# Altium PCB ScienceBoard.PcbDoc
Units mil, origin at the board's own origin, x right, y up, seen from the top; angles counter-clockwise.
Board outline 6505 x 2510 mil, 2 copper layers (Top Layer, Bottom Layer); 97 components, 67 nets, 334 pads, 0 vias.
Unrouted connection lines stored in the file: 206.
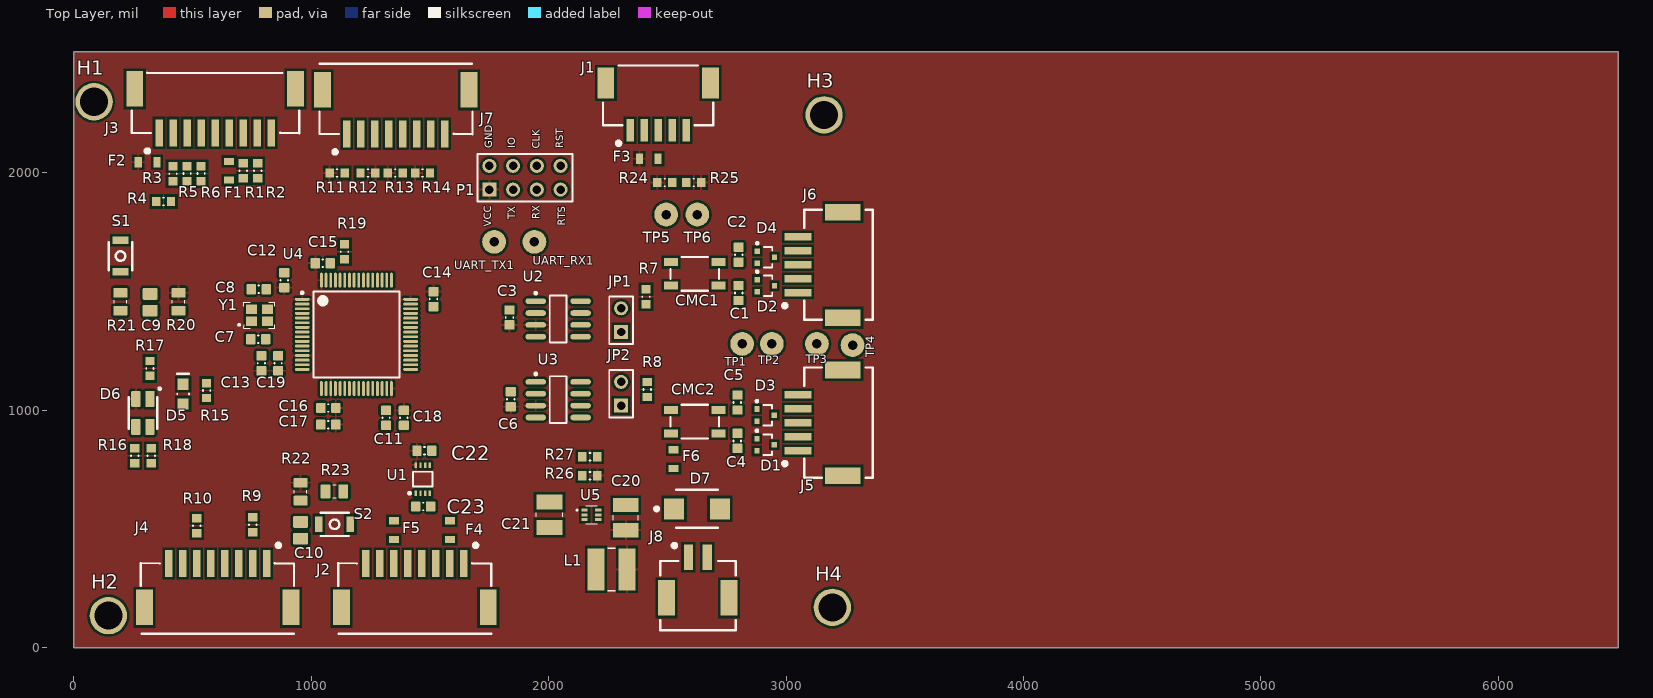
[diagram p0: Top Layer view]
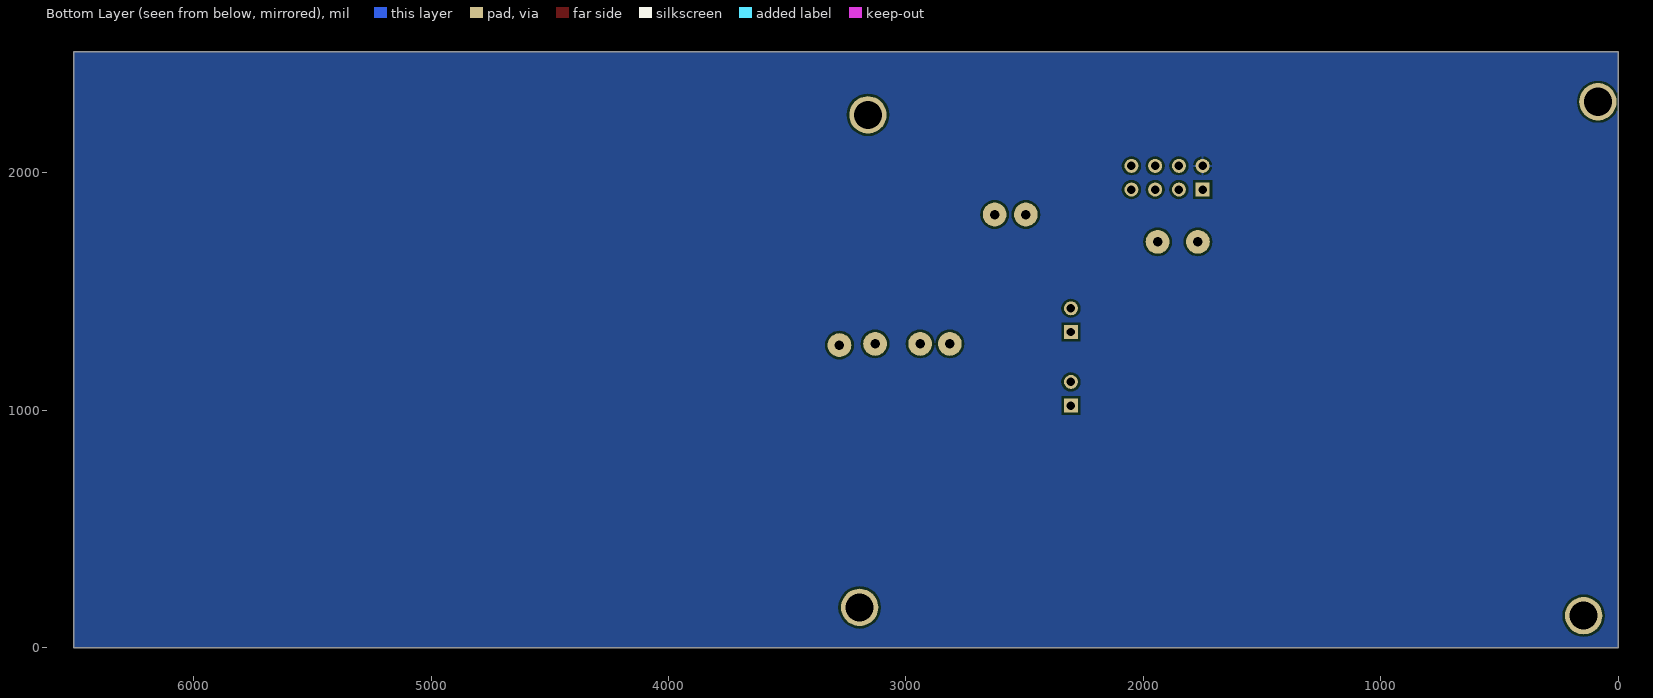
[diagram p1: Bottom Layer view, seen from below]

## Layer stack, top to bottom
Top Solder: solder mask 0.4, Solder Resist, Dk 3.5
Top Layer: signal copper 1.4
Dielectric 1: dielectric 12.6, FR-4, Dk 4.8
Bottom Layer: signal copper 1.4
Bottom Solder: solder mask 0.4, Solder Resist, Dk 3.5

## Board outline
0,0 6505,0 6505,2510 0,2510

## Design rules (kind name [scope] priority, off if disabled: settings)
Clearance [All] p1: gap=10 ignorepadtopadclearanceinfootprint=FALSE except(0: Arc-Hole Track-Hole SMDPad-Hole THPad-Hole Via-Hole Fill-Hole Poly-Hole Region-Hole Text-Hole)
DiffPairsRouting [All] p1: maxlimit=10 minlimit=10 mostfreqgap=10 toplayer_minwidth=15 toplayer_maxwidth=15 toplayer_prefwidth=15 bottomlayer_minwidth=15 bottomlayer_maxwidth=15 bottomlayer_prefwidth=15 maxuncoupledlength=500
PolygonConnect [All] p1: connectstyle=Relief reliefconductorwidth=10 reliefentries=4 polygonreliefangle="90 Angle" airgapwidth=10
RoutingVias [All] p1: holewidth=28 width=50 viastyle="Through Hole" minholewidth=28 minwidth=50 maxholewidth=28 maxwidth=50
SolderMaskExpansion [All] p1: expansion=4 istentingtop=FALSE
Width [All] p1: maxlimit=10 minlimit=10 preferedwidth=10
29 further rules are at their usual default settings.

## Classes and differential pairs
component class "SH5 - CAN": C1 C2 C3 C4 C5 C6 CMC1 CMC2 JP1 JP2 R7 R8 TP1 TP2 TP3 TP4 U2 U3
component class "SH4 - MICROCONTROLLER": C7 C8 C9 C10 C11 C12 C13 C14 C15 C16 C17 C18 C19 D5 D6 P1 R15 R16 R17 R18 R19 R20 R21 R22 R23 R24 R25 S1 S2 TP5 TP6 U4 UART_RX1 UART_TX1 Y1
component class "SH3 - SIGNAL CONDITIONING": C22 C23 H1 H2 H3 H4 R1 R2 R3 R4 R5 R6 U1
component class "SH2 - CONNECTORS": D1 D2 D3 D4 F1 F2 F3 F4 F5 J1 J2 J3 J4 J5 J6 J7 R9 R10 R11 R12 R13 R14
component class "SH1 - POWER": C20 C21 D7 F6 J8 L1 R26 R27 U5
differential pair CAN2: +CAN2_P -CAN2_N
differential pair CAN1: +CAN1_P -CAN1_N

## Components (designator, comment, footprint, x,y, rotation, side; value= is the part's Value field where it differs from the comment)
C1 "CAP_33pF_50V_0603" CAPC0603(1608)55_N 2800,1494.29 r90 top value=33pF
C2 "CAP_33pF_50V_0603" CAPC0603(1608)55_N 2800,1655.71 r270 top value=33pF
C3 "CAP_0.1uF_16V_0603" CAPC0603(1608)55_N 1835,1391.5 r90 top value=0.1μF
C4 "CAP_33pF_50V_0603" CAPC0603(1608)55_N 2795,871.5 r90 top value=33pF
C5 "CAP_33pF_50V_0603" CAPC0603(1608)55_N 2795,1032.91 r270 top value=33pF
C6 "CAP_0.1uF_16V_0603" CAPC0603(1608)55_N 1840,1046.5 r90 top value=0.1μF
C7 "50v" CAPC0603(1608)55_N 776.5,1300 r180 top value=14pF
C8 "50v" CAPC0603(1608)55_N 778.5,1510 r0 top value=14pF
C9 "CAP_1uF_16V_0805" CAPC2012X140N 321.16,1455.24 r270 top value=1uF
C10 "CAP_1uF_16V_0805" CAPC2012X140N 955,494.76 r90 top value=1uF
C11 "CAP_4.7uF_0603" CAPC0603(1608)55_N 1315,968.5 r90 top value=4.7μF
C12 "CAP_0.1uF_16V_0603" CAPC0603(1608)55_N 886.16,1548.5 r270 top value=0.1μF
C13 "CAP_1uF_16V_0603" CAPC0603(1608)55_N 790,1198.5 r270 top value=1μF
C14 "CAP_0.1uF_16V_0603" CAPC0603(1608)55_N 1515,1468.5 r90 top value=0.1μF
C15 "CAP_0.1uF_16V_0603" CAPC0603(1608)55_N 1048.5,1620 r180 top value=0.1μF
C16 "CAP_0.1uF_16V_0603" CAPC0603(1608)55_N 1071.5,1010 r0 top value=0.1μF
C17 "CAP_0.1uF_16V_0603" CAPC0603(1608)55_N 1071.5,940 r0 top value=0.1μF
C18 "CAP_4.7uF_0603" CAPC0603(1608)55_N 1390,968.5 r90 top value=4.7μF
C19 "CAP_10nF_0603" CAPC0603(1608)55_N 860,1198.5 r270 top value=10μF
C20 "GRM32ER71E226ME15K" CAPC3225X270N 2325.03,548.11 r270 top
C21 "CAP_4.7uF_25V_1210" CAPC3225X280N 2003.48,560 r270 top value=4.7uF
C22 "CAP_10nF_0603" CAPC0603(1608)55_N 1476.5,830 r0 top value=10μF
C23 "CAP_10nF_0603" CAPC0603(1608)55_N 1471.5,595 r180 top value=10μF
CMC1 "CMC_51uH" 744212510 2615.39,1575 r0 top
CMC2 "CMC_51uH" 744212510 2615.39,952.2 r0 top
D1 "TVS_DIODE_CAN" NXP-SOT323-3 2913.58,855 r0 top
D2 "TVS_DIODE_CAN" NXP-SOT323-3 2915,1525 r0 top
D3 "TVS_DIODE_CAN" NXP-SOT323-3 2913.58,980 r0 top
D4 "TVS_DIODE_CAN" NXP-SOT323-3 2915,1645 r0 top
D5 "LG R971-KN-1" LED_0805_LINE 460,1068.66 r90 top
D6 "LED_RGB" LED_RGB 290.69,989.06 r180 top
D7 "TVS_DIODE_UNIDIR_5V" TVS_DIODE_BIDIRECTIONAL 2624.7,585 r0 top
F1 "FUSE_250mA_0603" FUSE_0603 653.8,2009.57 r270 top
F2 "FUSE_250mA_0603" FUSE_0603 310.73,2045 r180 top
F3 "FUSE_250mA_0603" FUSE_0603 2421.59,2060 r0 top
F4 "FUSE_1.5A_0603" FUSE_0603 1584.06,495.43 r90 top
F5 "FUSE_1.5A_0603" FUSE_0603 1347.83,495.43 r90 top
F6 "FUSE_2A_0603" FUSE_0603 2526.16,794.57 r90 top
H1 "MOUNTING_HOLES" MOUNTING_HOLE 85,2300 r180 top
H2 "MOUNTING_HOLES" MOUNTING_HOLE 145,135 r0 top
H3 "MOUNTING_HOLES" MOUNTING_HOLE 3160,2245 r180 top
H4 "MOUNTING_HOLES" MOUNTING_HOLE 3195,170 r0 top
J1 "CON_5M_SM_VERT" MOLEX-5025840570 2461.16,2280 r0 top
J2 "CON_8M_SM_RA" MOLEX-5025850870 1229.72,355.04 r180 top
J3 "CON_9M_SM_RA" Molex-5025850970 358.52,2168.96 r0 top
J4 "CON_8M_SM_RA" MOLEX-5025850870 399.25,355.04 r180 top
J5 "" MOLEX-5025850570 3030.36,948.11 r270 top
J6 "" MOLEX-5025850570 3030.36,1613.43 r270 top
J7 "CON_8M_SM_RA" MOLEX-5025850870 1562.38,2165 r0 top
J8 "CON_2M_SM_RA" MOLEX-5024940270 2628.11,295.63 r0 top
JP1 "JUMPER_2" HDR1X2 2305,1330 r90 top
JP2 "JUMPER_2" HDR1X2 2305,1020 r90 top
L1 "IND_1uH_3.8A" IND_BOURNS_SDR04 2265.03,330.32 r0 top value=1uH
P1 "HEADER 4X2" HEADER_2X4 1750,1930 r0 top
R1 "RES_2.2kΩ_0603" RESC0603(1608)_N 712.85,2041.06 r270 top value=2.2kΩ
R2 "RES_3.3kΩ_0603" RESC0603(1608)_N 775,1978.07 r90 top value=3.3kΩ
R3 "RES_2.2kΩ_0603" RESC0603(1608)_N 417.58,2027.99 r270 top value=2.2kΩ
R4 "RES_3.3kΩ_0603" RESC0603(1608)_N 346.16,1880 r0 top value=3.3kΩ
R5 "RES_2.2kΩ_0603" RESC0603(1608)_N 476.63,1966.01 r90 top value=2.2kΩ
R6 "RES_3.3kΩ_0603" RESC0603(1608)_N 535.69,1966.01 r90 top value=3.3kΩ
R7 "RES_120Ω_0603" RESC0603(1608)_N 2410,1447.01 r90 top value=120Ω
R8 "RES_120Ω_0603" RESC0603(1608)_N 2415,1056.42 r90 top value=120Ω
R9 "RES_10kΩ_0603" RESC0603(1608)_N 753.58,550 r270 top value=10kΩ
R10 "RES_10kΩ_0603" RESC0603(1608)_N 517.36,545 r270 top value=10kΩ
R11 "RES_10kΩ_0603" RESC0603(1608)_N 1140.16,2000 r180 top value=10kΩ
R12 "RES_10kΩ_0603" RESC0603(1608)_N 1207.17,2000 r0 top value=10kΩ
R13 "RES_10kΩ_0603" RESC0603(1608)_N 1385.16,2000 r180 top value=10kΩ
R14 "RES_10kΩ_0603" RESC0603(1608)_N 1500.16,2000 r180 top value=10kΩ
R15 "RES_120Ω_0603" RESC0603(1608)_N 558.84,1115 r270 top value=120Ω
R16 "RES_20Ω_0603" RESC0603(1608)_N 256.16,840 r270 top value=20Ω
R17 "RES_120Ω_0603" RESC0603(1608)_N 320.21,1207.99 r270 top value=120Ω
R18 "RES_20Ω_0603" RESC0603(1608)_N 326.16,840 r270 top value=20Ω
R19 "RES_1kΩ_0603" RESC0603(1608)_N 1140,1637.01 r90 top value=1kΩ
R20 "RES_10kΩ_0805" RESC2012X60N 441.16,1457.6 r90 top value=10kΩ
R21 "RES_10kΩ_0805" RESC2012X60N 196.16,1457.6 r270 top value=10kΩ
R22 "RES_10kΩ_0805" RESC2012X60N 955,657.4 r90 top value=10kΩ
R23 "RES_10kΩ_0805" RESC2012X60N 1097.4,658.84 r0 top value=10kΩ
R24 "RES_1kΩ_0603" RESC0603(1608)_N 2520.21,1960 r180 top value=1kΩ
R25 "RES_1kΩ_0603" RESC0603(1608)_N 2579.27,1960 r0 top value=1kΩ
R26 "RES_453kΩ_0603" RESC0603(1608)_N 2142.01,725 r0 top value=453kΩ
R27 "RES_100kΩ_0603_1%" RESC0603(1608)_N 2205,805 r180 top value=100kΩ
S1 "SW_TACTILE" B3U-1000P 196.16,1650 r90 top
S2 "SW_TACTILE" B3U-1000P 1098.07,520 r180 top
TP1 "TESTPOINT_LOOP" TESTPOINT_LOOP 2815,1280 r0 top
TP2 "TESTPOINT_LOOP" TESTPOINT_LOOP 2940,1280 r0 top
TP3 "TESTPOINT_LOOP" TESTPOINT_LOOP 3130,1280 r0 top
TP4 "TESTPOINT_LOOP" TESTPOINT_LOOP 3280,1275 r0 top
TP5 "TESTPOINT_LOOP" TESTPOINT_LOOP 2495,1825 r270 top
TP6 "TESTPOINT_LOOP" TESTPOINT_LOOP 2626.16,1825 r270 top
U1 "SN74LVC2T45DCURG4" DCU0008A_L 1470,710 r90 top
U2 "IC TXRX CAN" LT-S8_N 2040,1385 r0 top
U3 "IC TXRX CAN" LT-S8_N 2040,1045 r0 top
U4 "STM32F446RET6" STM-LQFP64_L 1190.16,1320 r0 top
U5 "TLV62568ADRLR" SOT50P160X60-6N 2180.1,560 r0 top
UART_RX1 "TESTPOINT_LOOP" TESTPOINT_LOOP 1940,1710 r90 top
UART_TX1 "TESTPOINT_LOOP" TESTPOINT_LOOP 1770,1710 r90 top
Y1 "CRYSTAL_25MHZ" SOIC254P1016X440-4N 781.54,1400.59 r0 top

## Footprints (in the part's own frame and the unit in brackets; to place one, negate y for a bottom-side part, rotate by r counter-clockwise, add the part's x,y. Pads: shape width x height; smd on the part's side, far side on the other; paste and mask are expansions set on the pad)
744212510 [mm] "CMC HORIZONTAL 4 J-LEAD"
  rect 1.5x0.85 smd: 1(-2.55,-1.25) 3(-2.55,1.25) 4(2.55,1.25) 5(2.55,-1.25)
  silkscreen extent -2.6,-1.8 2.6,1.8, body extent -2.6,-1.8 2.6,1.8, height 1.67
B3U-1000P [mm] "TACTILE SWITCH GREY"
  rect 0.8x1.7 smd: 1(-1.7,0) 2(1.7,0)
  silkscreen extent -1.5,-1.25 1.5,1.25, body extent -2,-1.25 2,1.25, height 1.6
CAPC0603(1608)55_N [mm] "Chip Capacitor, Body 1.6x0.8mm, Height 0.55mm, IPC Medium Density"
  rrect20% 1x1.1 smd: 1(-0.8,0) 2(0.8,0)
  silkscreen extent -0.05,-0.4 0.05,0.4, body extent -0.87,-0.48 0.88,0.48, height 0.87
CAPC2012X140N [mm]
  rrect20% 1.25x1.6 smd: 1(-0.895,0) 2(0.895,0)
  body extent -1.1,-0.7 1.1,0.75, height 1.41
CAPC3225X270N [mm]
  rect 1.53x2.72 smd: 1(-1.341,0) 2(1.341,0)
  silkscreen extent -0.26,-1.35 0.26,1.35, body extent -1.6,-1.35 1.6,1.35, height 2.55
CAPC3225X280N [mm]
  rect 1.6x2.81 smd: 1(-1.353,0) 2(1.353,0)
  silkscreen extent -0.23,-1.4 0.23,1.4, body extent -1.6,-1.4 1.6,1.4, height 2.5
DCU0008A_L [mm] "SOP, 8-Leads, Body 2.4x2.1mm, Pitch 0.5mm, IPC High Density"
  rrect40% 0.6x0.25 smd: 1(-1.5,0.75) 2(-1.5,0.25) 3(-1.5,-0.25) 4(-1.5,-0.75) 5(1.5,-0.75) 6(1.5,-0.25) 7(1.5,0.25) 8(1.5,0.75)
  silkscreen extent -1.62,-1.05 0.8,1.55, body extent -1.56,-1 1.56,1, height 0.9
FUSE_0603 [mm] "Chip Fuse, Body 1.6x0.81mm"
  rect 0.762x1.09 smd: 1(-1.005,0) 2(1.005,0)
  body extent -0.8,-0.38 0.8,0.38, height 0.75
HDR1X2 [mm] "Connector; Header; 2 Position"
  rect 1.5x1.5 hole 0.9: 1(0,0)
  round 1.5 hole 0.9: 2(2.54,0)
  silkscreen extent -1.27,-1.27 3.81,1.27, body extent -1.27,-1.27 3.81,1.27, height 6.35
HEADER_2X4 [mm]
  rect 1.5x1.5 hole 0.9: 1(0,0)
  round 1.5 hole 0.9: 2(2.54,0) 3(5.08,0) 4(7.62,0) 5(0,2.54) 6(2.54,2.54) 7(5.08,2.54) 8(7.62,2.54)
  silkscreen extent -1.27,-1.27 8.89,3.81, body extent -1.36,-1.32 8.8,3.67, height 8.54
IND_BOURNS_SDR04 [mil]
  rect 71x177 smd paste+0 mask+0: 1(-65,0) 2(65,0)
  silkscreen extent -16,-90 16,90
LED_0805_LINE [mm] "SMD, 2-Leads, Body 2x1.25mm"
  rect 1.2x1.2 smd: 1(-1.05,0) 2(1.05,0)
  silkscreen extent -0.05,-0.63 2.16,0.64, body extent -1,-0.63 1,0.63, height 0.8
LED_RGB [mm]
  rrect20% 1x1.7 smd: 1(-0.75,-1.5) 2(-0.75,1.5) 3(0.75,1.5) 4(0.75,-1.5)
  silkscreen extent -1.92,-2.72 1.53,1.7, body extent -1.4,-1.75 1.4,1.75, height 1.89
LT-S8_N [mm] "SOP, 8-Leads, Body 4.9x3.9mm, Pitch 1.27mm, IPC Medium Density"
  oval 2.2x0.6 smd: 1(-2.4,1.905) 2(-2.4,0.635) 3(-2.4,-0.635) 4(-2.4,-1.905) 5(2.4,-1.905) 6(2.4,-0.635) 7(2.4,0.635) 8(2.4,1.905)
  silkscreen extent -2.52,-2.5 0.9,2.88, body extent -2,-2.5 2,2.5, height 1.76
MOLEX-5024940270 [mm] "Molex 5024940670 2 pin 2mm pitch SMD RA connector"
  rect 1.8x3.8 smd: 0(-3.35,-2.175) 0(3.35,-2.175)
  rect 1x2.7 smd: 1(-1,2.175) 2(1,2.175)
  silkscreen extent -4,-5.64 4.06,3.62, body extent -4,-5.74 4,2.76, height 6.91
MOLEX-5025840570 [mm] "Molex 5024940670 12 pin 1.5 mm pitch SMD vertical connector"
  rect 1.8x3.3 smd: 0(-5.6,2.525) 0(5.6,2.525)
  rect 0.8x2.4 smd: 1(-3,-2.525) 2(-1.5,-2.525) 3(0,-2.525) 4(1.5,-2.525) 5(3,-2.525)
  silkscreen extent -5.9,-4.14 5.9,4.39, body extent -5.9,-3.01 5.9,4.39, height 7.31
MOLEX-5025850570 [mm]
  rect 1.8x3.8 smd: 0(-5.625,5.32) 0(5.675,5.32)
  rect 0.8x2.9 smd: 1(3,0.5) 2(1.5,0.5) 3(0,0.5) 4(-1.5,0.5) 5(-3,0.5)
  silkscreen extent -5.9,-1.1 5.9,8.5, body extent -5.9,0 5.9,8.5, height 6.21
MOLEX-5025850870 [mm]
  rect 1.8x3.8 smd: 0(-13.1,4.7) 0(2.6,4.7)
  rect 0.8x2.9 smd: 1(-10.5,0) 2(-9,0) 3(-7.5,0) 4(-6,0) 5(-4.5,0) 6(-3,0) 7(-1.5,0) 8(0,0)
  silkscreen extent -13.4,-2.14 2.97,7.51, body extent -13.4,-0.99 2.9,7.51, height 6.41
Molex-5025850970 [mm]
  rect 1.8x3.8 smd: 0(-2.6,4.7) 0(14.6,4.7)
  rect 0.8x2.9 smd: 1(0,0) 2(1.5,0) 3(3,0) 4(4.5,0) 5(6,0) 6(7.5,0) 7(9,0) 8(10.5,0) 9(12,0)
  silkscreen extent -2.9,-2.14 15,6.45, body extent -2.9,-1.52 14.9,6.98, height 2.6
MOUNTING_HOLE [mm]
  round 4 hole 3 unplated: 0(0,0)
NXP-SOT323-3 [mm] "SOT23, 3-Leads, Body 2.2x1.35mm, Pitch 0.65mm"
  rect 0.55x0.6 smd paste-1: 1(-0.925,0.65) 2(-0.925,-0.65) 3(0.925,0)
  silkscreen extent -1.05,-1.1 0.67,1.62, body extent -1.15,-1.1 1.15,1.1, height 1.1
RESC0603(1608)_N [mm] "Chip Resistor, Body 1.6x0.8mm, IPC Medium Density"
  rect 0.9x1 smd: 1(0,0) 2(1.6,0)
  silkscreen extent 0.75,-0.4 0.85,0.4, body extent -0.05,-0.47 1.65,0.47, height 0.6
RESC2012X60N [mm]
  rrect20% 1.05x1.5 smd: 1(-0.955,0) 2(0.955,0)
  silkscreen extent -0.17,-0.68 0.17,0.68, body extent -1,-0.62 1,0.62, height 0.6
SOIC254P1016X440-4N [mm]
  rect 1.2x1 smd: 1(-0.85,-0.65) 2(0.85,-0.65) 3(0.85,0.65) 4(-0.85,0.65)
  silkscreen extent -2.27,-1.37 1.65,1.37, body extent -1.24,-0.85 1.24,0.85, height 0.56
SOT50P160X60-6N [mm]
  rect 0.66x0.31 smd: 1(-0.735,0.5) 2(-0.735,0) 3(-0.735,-0.5) 4(0.735,-0.5) 5(0.735,0) 6(0.735,0.5)
  silkscreen extent -1.62,-0.97 0.6,0.97, body extent -0.8,-0.8 0.8,0.8, height 0.6
STM-LQFP64_L [mm] "QFP, 64-Leads, Body 10x10mm, Pitch 0.5mm, IPC High Density"
  oval 1.6x0.3 smd: 1(-5.8,3.75) 2(-5.8,3.25) 3(-5.8,2.75) 4(-5.8,2.25) 5(-5.8,1.75) 6(-5.8,1.25) 7(-5.8,0.75) 8(-5.8,0.25) 9(-5.8,-0.25) 10(-5.8,-0.75) 11(-5.8,-1.25) 12(-5.8,-1.75) 13(-5.8,-2.25) 14(-5.8,-2.75) 15(-5.8,-3.25) 16(-5.8,-3.75) 33(5.8,-3.75) 34(5.8,-3.25) 35(5.8,-2.75) 36(5.8,-2.25) 37(5.8,-1.75) 38(5.8,-1.25) 39(5.8,-0.75) 40(5.8,-0.25) 41(5.8,0.25) 42(5.8,0.75) 43(5.8,1.25) 44(5.8,1.75) 45(5.8,2.25) 46(5.8,2.75) 47(5.8,3.25) 48(5.8,3.75)
  oval 0.3x1.6 smd: 17(-3.75,-5.8) 18(-3.25,-5.8) 19(-2.75,-5.8) 20(-2.25,-5.8) 21(-1.75,-5.8) 22(-1.25,-5.8) 23(-0.75,-5.8) 24(-0.25,-5.8) 25(0.25,-5.8) 26(0.75,-5.8) 27(1.25,-5.8) 28(1.75,-5.8) 29(2.25,-5.8) 30(2.75,-5.8) 31(3.25,-5.8) 32(3.75,-5.8) 49(3.75,5.8) 50(3.25,5.8) 51(2.75,5.8) 52(2.25,5.8) 53(1.75,5.8) 54(1.25,5.8) 55(0.75,5.8) 56(0.25,5.8) 57(-0.25,5.8) 58(-0.75,5.8) 59(-1.25,5.8) 60(-1.75,5.8) 61(-2.25,5.8) 62(-2.75,5.8) 63(-3.25,5.8) 64(-3.75,5.8)
  silkscreen extent -5.92,-4.6 4.6,4.6, body extent -5,-5 5,5, height 1.6
TESTPOINT_LOOP [mm]
  round 2.54 hole 1.02: 1(0,0)
  body extent -1.27,-1.27 1.27,1.27, height 4.57
TVS_DIODE_BIDIRECTIONAL [mm]
  rect 2.16x2.26 smd: 1(-2.45,0) 2(2.45,0)
  silkscreen extent -4.5,-2.03 2.25,2.03, body extent -2.7,-1.8 2.7,1.8, height 2.27

## Part data
C1 C2 C4 C5: "CAP CER 33PF 50V C0G/NP0", Case Code (Imperial)=0603, Case Code (Metric)=1608, Dielectric="C0G, NP0", Dielectric Material=Ceramic, Insulation Resistance=100GR, Manufacturer 1=Yageo, Manufacturer Part Number 1=CC0603JRNPO9BN330, Max Operating Temperature=125°C, Min Operating Temperature=-55°C, Supplier Part Number 1=311-1064-1-ND, Temperature Coefficient=30ppm/°C, Tolerance=5%, Voltage=50V, ComponentLink7Description=https://datasheet.ciiva.com/11464/upy-gp-np0-16v-to-50v-8-11464730.pdf?src-supplier=Avnet, ComponentLink7URL=https://datasheet.ciiva.com/11464/upy-gp-np0-16v-to-50v-8-11464730.pdf?src-supplier=Avnet, ComponentLink8Description=https://datasheet.ciiva.com/46430/1835847-46430155.pdf?src-supplier=Element14, ComponentLink8URL=https://datasheet.ciiva.com/46430/1835847-46430155.pdf?src-supplier=Element14, ComponentLink9Description=https://datasheet.ciiva.com/144/mlccorderingcode-144644.pdf?src-supplier=Digi-Key, ComponentLink9URL=https://datasheet.ciiva.com/144/mlccorderingcode-144644.pdf?src-supplier=Digi-Key, ComponentLink10Description=https://datasheet.ciiva.com/5426/upy-gp-np0-16v-to-50v-8-5426614.pdf?src-supplier=Mouser, ComponentLink10URL=https://datasheet.ciiva.com/5426/upy-gp-np0-16v-to-50v-8-5426614.pdf?src-supplier=Mouser, ComponentLink11Description=https://datasheet.ciiva.com/7978/1443161-7978142.pdf?src-supplier=Element14, ComponentLink11URL=https://datasheet.ciiva.com/7978/1443161-7978142.pdf?src-supplier=Element14, Composition=Ceramic, Depth=0.8mm, Height=0.8mm, Length=1.6mm, Mount="Surface Mount", Number of Pins=2, Package=0603, REACH SVHC="No SVHC", Supplier 1=Digi-Key, Termination=SMD/SMT, Thickness=0.035inch, Voltage Rating=50V, Voltage Rating (DC)=50V, Width=0.031inch
C3 C6 C12 C14 C15 C16 C17: "CAP CER 0.1UF 16V X7R 0603", Case Code (Imperial)=0603, Case Code (Metric)=1608, Dielectric=X7R, Manufacturer 1=Yageo, Manufacturer Part Number 1=CC0603KRX7R7BB104, Package="0603 (1608 Metric)", Supplier Part Number 1=311-1088-1-ND, Voltage Rating=16V, Dimensions="0.063\" L x 0.031\" W (1.60mm x 0.80mm)", Mount="Surface Mount", Supplier 1=Digi-Key, Temperature Coefficient=X7R
C7 C8: library part CAP_14pF_50V_0603, "CAP CER 14PF 50V C0G/NP0 0603", Case Code (Imperial)=0603, Case Code (Metric)=1608, Dielectric="C0G, NP0", Manufacturer 1=Samsung, Manufacturer Part Number 1=CL10C140JB8NNNC, Max Operating Temperature=125°C, Min Operating Temperature=-55°C, Package="0603 (1608 Metric)", Supplier Part Number 1=1276-2187-1-ND, Tolerance=5%, Voltage Rating=50V, Depth=0.8mm, Height=0.8mm, Length=1.6mm, Mount="Surface Mount", Supplier 1=Digi-Key, Thickness=0.035inch, Voltage Rating (DC)=50V, Width=0.031inch
C9 C10: "CAP CER 1UF 16V X7R 0805", Capacitance=1uF, Case Code (Imperial)=0805, Case Code (Metric)=2012, Dielectric=X7R, Manufacturer 1=Yageo, Manufacturer Part Number 1=CC0805KKX7R7BB105, Max Operating Temperature=125°C, Min Operating Temperature=-55°C, Supplier Part Number 1=311-1365-1-ND, Tolerance=10%, Voltage Rating=16V, Case/Package=0805, Mount="Surface Mount", Supplier 1=Digi-Key, Termination=SMD/SMT
C11 C18: "CAP CER 4.7UF 6.3V X5R 0603", Case Code (Imperial)=0603, Case Code (Metric)=1608, Dielectric=X5R, Manufacturer 1=Yageo, Manufacturer Part Number 1=CC0603KRX5R5BB475, Package="0603 (1608 Metric)", Supplier Part Number 1=311-1521-1-ND, Voltage Rating=6.3V, Dimensions="0.063\" L x 0.031\" W (1.60mm x 0.80mm)", Mount="Surface Mount", Supplier 1=Digi-Key, Temperature Coefficient=X5R
C13: "CAP CER 1UF 16V Y5V 0603", Case Code (Imperial)=0603, Case Code (Metric)=1608, Dielectric=Y5V, Manufacturer 1=Yageo, Manufacturer Part Number=CC0603ZRY5V7BB105, Package="0603 (1608 Metric)", Supplier Part Number 1=311-1372-1-ND, Voltage Rating=16V, Dimensions="0.063\" L x 0.031\" W (1.60mm x 0.80mm)", Manufacturer Part Number 1=CC0603ZRY5V7BB105, Mount="Surface Mount", Supplier 1=Digi-Key, Temperature Coefficient=Y5V
C19 C22 C23: "CAP CER 10000PF 16V X7R 0603", Case Code (Imperial)=0603, Case Code (Metric)=1608, Dielectric=X7R, Manufacturer 1=Yageo, Manufacturer Part Number 1=CC0603KRX7R7BB103, Package="0603 (1608 Metric)", Supplier Part Number 1=311-3369-1-ND, Voltage Rating=16V, Dimensions="0.063\" L x 0.031\" W (1.60mm x 0.80mm)", Mount="Surface Mount", Supplier 1=Digi-Key, Temperature Coefficient=X7R
C20: "CAP CER 22UF 25V X7R 1210", Capacitance=22uF, Manufacturer 1="Murata Electronics", Package="1210 (3225 Metric)", Supplier Part Number 1=490-14682-1-ND, Tolerance=±20%, Voltage=25V, Manufacturer Part Number 1=GRM32ER71E226ME15K, Supplier 1=Digi-Key
C21: "CAP CER 4.7UF 25V X8L 1210", Capacitance=4.7uF, Case Code (Imperial)=1210, Case Code (Metric)=3225, Manufacturer 1="Murata Electronics", Manufacturer Part Number 1=GCJ32EL81E475KA01L, Max Operating Temperature=150°C, Min Operating Temperature=-55°C, Supplier Part Number 1=490-16465-1-ND, Tolerance=10%, Voltage Rating=25V, Case/Package=1210, Mount="Surface Mount", Supplier 1=Digi-Key
CMC1 CMC2: "CMC 51uH 300MA 2LN SMD", Case/Package=SMD/SMT, Current=300mA, DC Resistance (DCR)=160mR, Inductance=51uH, Inductance Tolerance=50%, Manufacturer 1="Wurth Electronics", Manufacturer Part Number 1=744212510, Max Operating Temperature=105°C, Min Operating Temperature=-40°C, Supplier Part Number 1=732-3941-1-ND, Test Frequency=100kHz, Voltage Rating (DC)=80V, ComponentLink7Description=https://datasheet.ciiva.com/6216/744212510-6216348.pdf?src-supplier=Digi-Key, ComponentLink7URL=https://datasheet.ciiva.com/6216/744212510-6216348.pdf?src-supplier=Digi-Key, ComponentLink8Description=https://datasheet.ciiva.com/7764/1735560-7764951.pdf?src-supplier=Element14, ComponentLink8URL=https://datasheet.ciiva.com/7764/1735560-7764951.pdf?src-supplier=Element14, Core Material=Ferrite, Current Rating=300mA, Depth=3.6mm, Height=1.65mm, Impedance=300R, Length=6.5mm, Max DC Current=300mA, Mount="Surface Mount", Number of Lines=2, Number of Pins=4, REACH SVHC="No SVHC", Supplier 1=Digi-Key, Termination=SMD/SMT, Tolerance=50%, Width=0.142inch
D1 D2 D3 D4: "TVS DIODE 24V 41V SOT323-3", Manufacturer="Nexperia USA Inc.", Manufacturer Part Number=PESD2CAN,215, Package="SC-70, SOT-323", Supplier Part Number 1=1727-3891-1-ND, ComponentLink1Description=Datasheet, ComponentLink1URL=https://assets.nexperia.com/documents/data-sheet/PESD1CAN-U.pdf, Supplier 1=Digi-Key
D5: library part DIO_LED_G, "LED GREEN DIFFUSED 0805 SMD", Forward Voltage Drop=2.2V, Manufacturer 1=OSRAM, Package="0805 (2012 Metric)", Supplier Part Number 1=475-1410-1-ND, Manufacturer Part Number 1="LG R971-KN-1", Mount="Surface Mount", Supplier 1=Digi-Key
D6: "LED RGB DIFFUSED 4PLCC SMD", Case/Package=PLCC, Color=Blue,Green,Red, Forward Voltage=3.1V, Lens Color=White, Manufacturer 1=Broadcom, Manufacturer Part Number 1=ASMB-MTB1-0A3A2, Supplier Part Number 1=516-3280-1-ND, Test Current=20mA, ComponentLink1Description=http://www.farnell.com/datasheets/2111106.pdf?src-supplier=Farnell, ComponentLink1URL=http://www.farnell.com/datasheets/2111106.pdf?src-supplier=Farnell, ComponentLink2Description=https://docs.broadcom.com/docs/AV02-4194EN?src-supplier=Digi-Key, ComponentLink2URL=https://docs.broadcom.com/docs/AV02-4194EN?src-supplier=Digi-Key, ComponentLink3Description=http://www.farnell.com/datasheets/1801564.pdf?src-supplier=Element14, ComponentLink3URL=http://www.farnell.com/datasheets/1801564.pdf?src-supplier=Element14, ComponentLink4Description=http://www.farnell.com/datasheets/2111106.pdf?src-supplier=Newark, ComponentLink4URL=http://www.farnell.com/datasheets/2111106.pdf?src-supplier=Newark, Dominant Wavelength=470nm, Height=1.9mm, Length=3.2mm, Lens Style=Round, Lens Transparency=Diffused, Luminous Intensity=350mcd, Mount="Surface Mount", Number of Pins=4, Packaging="Cut Tape", Pricing 1="1=0.60000, 10=0.47100, 100=0.30210, 500=0.25980, 1000=0.20059 (USD)", REACH SVHC="No SVHC", RoHS=Yes, Stock 1=142531, Supplier 1=Digi-Key, Viewing Angle=115°, Width=2.8mm
D7: "TVS DIODE 5V 9.2V DO214AA", Breakdown Voltage=6.4V, Case/Package=SMB, Clamping Voltage=9.2V, Current=68A, Leakage Current=800uA, Manufacturer 1=Littelfuse, Manufacturer Part Number 1=SMBJ5.0A, Max Breakdown Voltage=7V, Max Operating Temperature=150°C, Max Power Dissipation=600W, Max Surge Current=65.3A, Min Operating Temperature=-55°C, Operating Supply Voltage=5V, Power Line Protection=No, Supplier Part Number 1=SMBJ5.0ALFCT-ND, Test Current=10mA, ComponentLink7Description=https://datasheet.ciiva.com/331/littelfuse-tvs-diode-smbj-datasheet-pdf-331133.pdf?src-supplier=Digi-Key, ComponentLink7URL=https://datasheet.ciiva.com/331/littelfuse-tvs-diode-smbj-datasheet-pdf-331133.pdf?src-supplier=Digi-Key, Composition=Zener, Direction=Unidirectional, Element Configuration=Single, ESD Protection=Yes, Height=0.096inch, Length=0.179inch, Max Reverse Leakage Current=800uA, Min Breakdown Voltage=6.4V, Mount="Surface Mount", Number of Channels=1, Number of Elements=1, Number of Pins=2, Number of Unidirectional Channels=1, Peak Pulse Current=65.3A, Peak Pulse Power=600W, Polarity=Unidirectional, Power Dissipation=600W, REACH SVHC=Unknown, Reverse Breakdown Voltage=6.4V, Reverse Standoff Voltage=5V, Supplier 1=Digi-Key, Termination=SMD/SMT, Voltage=5V, Voltage Rating (DC)=5V, Width=0.155inch
F1 F2 F3: "FUSE SMD 250mA 32V", Current Rating=250mA, Manufacturer 1=Littelfuse, Manufacturer Part Number 1=0467.250NRHF, Supplier Part Number 1=F6020CT-ND, Voltage Rating (AC)=32V, Mount="Surface Mount", Response Time="Fast Blow", Supplier 1=Digi-Key, Supplier Packaging 1="Cut Tape", Voltage Rating (DC)=32V
F4 F5: "FUSE SMD 1.5A 32V", Current Rating=1.5A, Manufacturer 1=Littelfuse, Manufacturer Part Number 1=046701.5NRHF, Supplier Part Number 1=F5702CT-ND, Voltage Rating (AC)=32V, Mount="Surface Mount", Response Time="Fast Blow", Supplier 1=Digi-Key, Supplier Packaging 1="Cut Tape", Voltage Rating (DC)=32V
F6: "FUSE SMD 2A 32V", Current Rating=2A, Manufacturer 1=Littelfuse, Manufacturer Part Number 1=0467002.NRHF, Supplier Part Number 1=F7132CT-ND, Voltage Rating (AC)=32V, Mount="Surface Mount", Response Time="Fast Blow", Supplier 1=Digi-Key, Supplier Packaging 1="Cut Tape", Voltage Rating (DC)=32V
H1 H2 H3 H4: "6cm x 6cm"
J1: "CONN HEADER SMD VERTICAL 1.5MM PITCH", Color=Beige, Current Rating=2A, Manufacturer 1=Molex, Manufacturer Part Number 1=5025840570, Max Operating Temperature=85°C, Min Operating Temperature=-25°C, Supplier Part Number 1=WM14463CT-ND, Voltage Rating=100V, Connector Type="Receptacle,Center Strip Contact", Contact Gender=Female, Contact Material="Copper Alloy", Contact Plating=Tin, Depth=6.35mm, Fastening Type=Latch, Gender=Female, Glow Wire Compliant=Non-compliant, Housing Color=Beige, Housing Material=Resin, Length=11.8mm, Mount="Surface Mount", Number of Circuits=5, Number of Contacts=5, Number of Positions=5, Number of Rows=1, Orientation=Vertical, Pitch=1.5mm, REACH SVHC="No SVHC", Supplier 1=Digi-Key, Termination=Solder
J2 J4 J7: "CONN HEADER SMD RIGHT ANGLE 1.5 MM PITCH", Case/Package=SIL, Color=Beige, Contact Resistance=20mR, Current Rating=2A, Manufacturer=Molex, Manufacturer Part Number=5025850870, Max Operating Temperature=85°C, Min Operating Temperature=-40°C, Supplier Part Number 1=WM14471CT-ND, Voltage Rating=100V, Category="Headers and Wire Housings", Connector Type="Receptacle,Center Strip Contact", Contact Gender=Female, Contact Material="Copper,Copper Alloy,Tin", Contact Plating=Tin, Depth=7.3mm, Fastening Type=Latch, Gender=Receptacle, Glow Wire Compliant=Non-compliant, Housing Color=Beige, Housing Material=Resin, Length=16.3mm, Mount="Surface Mount", Number of Circuits=8, Number of Contacts=8, Number of Positions=8, Number of Rows=1, Orientation="Right Angle", Pitch=1.5mm, REACH SVHC=Unknown, Supplier 1=Digi-Key, Termination=Solder
J3: "CONN RCPT 9POS CLIK-MATE 0.059 TIN SMD R/A", Color=Beige, Contact Resistance=20mR, Current Rating=2A, Manufacturer=Molex, Manufacturer Part Number=5025850970, Max Operating Temperature=85°C, Min Operating Temperature=-40°C, Supplier Part Number 1=WM20816CT-ND, Category="Headers and Wire Housings", Connector Type="Receptacle,Center Strip Contact", Contact Material="Copper Alloy", Contact Plating=Tin, Depth=7.3mm, Fastening Type=Latch, Glow Wire Compliant=Non-compliant, Housing Color=Beige, Housing Material=Resin, Length=17.8mm, Mount="Surface Mount", Number of Circuits=9, Number of Contacts=9, Number of Positions=9, Number of Rows=1, Orientation="Right Angle", Pitch=1.5mm, REACH SVHC="No SVHC", Supplier 1=Digi-Key, Termination=Solder
J5 J6: library part CON_5M_SM_RA, "CONN HEADER SMD RIGHT ANGLE 1.5MM PITCH", Current Rating=2A, Manufacturer 1=Molex, Manufacturer Part Number 1=5025850570, Supplier Part Number 1=WM14469CT-ND, Connector Type="Receptacle,Center Strip Contact", Mount="Surface Mount", Number of Circuits=5, Number of Contacts=5, Number of Positions=5, Number of Rows=1, Orientation="Right Angle", RoHS=Yes, Stock 1=2875, Supplier 1=Digi-Key, Termination=Solder
J8: "CONN HEADER SMD RIGHT ANGLE 2MM PITCH", Flammability Rating="UL94 V-0", Insulation Color=Natural, Manufacturer 1=Molex, Manufacturer Part Number 1=5024940270, Max Operating Temperature=105°C, Min Operating Temperature=-40°C, Supplier Part Number 1=WM15810CT-ND, Connector Type=Receptacle,Forked, Contact Plating=Tin, Fastening Type=Latch, Insulation Material=Resin, Mount="Surface Mount", Number of Positions=2, Number of Rows=1, Supplier 1=Digi-Key, Termination=Solder
JP1 JP2: "HEADER 2X1", Manufacturer 1="TE Connectivity", Manufacturer Part Number 1=87220-2, Supplier Part Number 1=A26542-ND, Mount="Through Hole", Supplier 1=Digi-Key
L1: "FIXED IND 1UH 3.8A 33 MOHM SMD", Current Rating=3.8A, Manufacturer 1="Bourns Inc.", Manufacturer Part Number 1=SDR0403-1R0ML, Supplier Part Number 1=SDR0403-1R0MLCT-ND, Tolerance=±20%, Supplier 1=Digi-Key
P1: "CONN HEADER VERT 8POS 2.54MM", Manufacturer 1="Harwin Inc.", Manufacturer Part Number 1=M20-9980445, Supplier Part Number 1=952-2122-ND, Mount="Through Hole", Supplier 1=Digi-Key
R1 R3 R5: "RES SMD 2.2K OHM 1% 1/10W 0603", Case Code (Imperial)=0603, Case Code (Metric)=1608, Manufacturer 1=Yageo, Manufacturer Part Number 1=RC0603FR-072K2L, Package="0603 (1608 Metric)", Supplier Part Number 1=311-2.20KHRCT-ND, Tolerance=1%, Dimensions="0.063\" L x 0.031\" W (1.60mm x 0.80mm)", Mount="Surface Mount", Supplier 1=Digi-Key
R2 R4 R6: "RES SMD 3.3K OHM 5% 1/10W 0603", Case Code (Imperial)=0603, Case Code (Metric)=1608, Manufacturer 1=Yageo, Manufacturer Part Number 1=RC0603JR-073K3L, Package="0603 (1608 Metric)", Supplier Part Number 1=311-3.3KGRCT-ND, Tolerance=5%, Dimensions="0.063\" L x 0.031\" W (1.60mm x 0.80mm)", Mount="Surface Mount", Supplier 1=Digi-Key
R7 R8 R15 R17: "RES SMD 120 OHM 5% 1/10W 0603", Case Code (Imperial)=0603, Case Code (Metric)=1608, Manufacturer 1=Yageo, Manufacturer Part Number 1=RC0603JR-07120RL, Package="0603 (1608 Metric)", Supplier Part Number 1=311-120GRCT-ND, Tolerance=5%, Dimensions="0.063\" L x 0.031\" W (1.60mm x 0.80mm)", Mount="Surface Mount", Supplier 1=Digi-Key
R9 R10 R11 R12 R13 R14: "RES SMD 10K OHM 5% 1/10W 0603", Case Code (Imperial)=0603, Case Code (Metric)=1608, Manufacturer 1=Yageo, Manufacturer Part Number 1=RC0603JR-0710KL, Package="0603 (1608 Metric)", Supplier Part Number 1=311-10KGRCT-ND, Tolerance=5%, Dimensions="0.063\" L x 0.031\" W (1.60mm x 0.80mm)", Mount="Surface Mount", Supplier 1=Digi-Key
R16 R18: "RES SMD 20 OHM 5% 1/10W 0603", Case Code (Imperial)=0603, Case Code (Metric)=1608, Manufacturer 1=Yageo, Manufacturer Part Number 1=RC0603JR-0720RL, Package="0603 (1608 Metric)", Supplier Part Number 1=311-20GRCT-ND, Tolerance=5%, Dimensions="0.063\" L x 0.031\" W (1.60mm x 0.80mm)", Mount="Surface Mount", Supplier 1=Digi-Key
R19 R24 R25: "RES SMD 1K OHM 5% 1/10W 0603", Case Code (Imperial)=0603, Case Code (Metric)=1608, Manufacturer 1=Yageo, Manufacturer Part Number 1=RC0603JR-071KL, Package="0603 (1608 Metric)", Supplier Part Number 1=311-1.0KGRCT-ND, Tolerance=5%, Dimensions="0.063\" L x 0.031\" W (1.60mm x 0.80mm)", Mount="Surface Mount", Supplier 1=Digi-Key
R20 R21 R22 R23: "RES SMD 10K OHM 1% 1/8W 0805", Case Code (Imperial)=0805, Case Code (Metric)=2012, Manufacturer 1=Yageo, Manufacturer Part Number 1=RC0805FR-0710KL, Max Operating Temperature=155°C, Min Operating Temperature=-55°C, Power Rating=125mW, Resistance=10K, Supplier Part Number 1=311-10.0KCRCT-ND, Tolerance=1%, Supplier 1=Digi-Key, Termination=SMD/SMT
R26: "RES SMD 453K OHM 1% 1/10W 0603", Case Code (Metric)=1608, Case/Package=0603, Manufacturer 1="Panasonic Electronic Components", Manufacturer Part Number 1=ERJ-3EKF4533V, Supplier Part Number 1=P453KHCT-ND, Tolerance=1%, Dimensions="0.063\" L x 0.031\" W (1.60mm x 0.80mm)", Mount="Surface Mount", Package=0603, Supplier 1=Digi-Key
R27: "RES SMD 100K OHM 1% 1/10W 0603", Case Code (Metric)=1608, Case/Package=0603, Manufacturer 1=Yageo, Manufacturer Part Number 1=RC0603FR-07100KL, Supplier Part Number 1=311-100KHRCT-ND, Tolerance=1%, Dimensions="0.063\" L x 0.031\" W (1.60mm x 0.80mm)", Mount="Surface Mount", Package=0603, Supplier 1=Digi-Key
S1 S2: "Tactile Switch (Grey)", Manufacturer 1="Omron Electronics Inc-EMC Div", Manufacturer Part Number 1=B3U-1000P, Supplier Part Number 1=SW1020CT-ND, Mount="Surface Mount", Supplier 1=Digi-Key
TP1 TP2 TP3 TP4 TP5 TP6 UART_RX1 UART_TX1: "PC TEST POINT MINIATURE WHITE", Manufacturer 1="Keystone Electronics", Manufacturer Part Number 1=5002, Supplier Part Number 1=36-5002-ND, Mount="Through Hole", Supplier 1=Digi-Key
U1: library part IC_LVL_SHIFTER, "IC BIDIRECTIONAL LEVEL SHIFTER 8-VSSOP", F @ Nom Voltage(Max)(Mhz)=150, Generic Part Number=SN74LVC2T45, ICC @ Nom Voltage(Max)(mA)=0.004, Manufacturer 1="Texas Instruments", Operating Temperature Range(C)="-40 to 85", Rating=Military, Supplier Part Number 1=296-39213-2-ND, tpd @ Nom Voltage(Max)(ns)=17.7,10.3,8.3,7.2, Voltage(Nom)(V)=1.8,2.5,3.3,5, 3-State Output=Yes, Bits(#)=2, DatasheetVersion=SCES516J, Input Type=CMOS/TTL, Logic=True, Manufacturer Part Number 1=SN74LVC2T45DCURG4, Mount="Surface Mount", Output Drive (IOL/IOH)(Max)(mA)=32/-32, Output Type=CMOS, PackageReference=DCU0008A, Schmitt Trigger=No, Sub-Family="Dual Supply Translator", Supplier 1=Digi-Key, Technology Family=LVC, VCC(Max)(V)=5.5, VCC(Min)(V)=1.65
U2 U3: library part LTC2875, "IC TXRX CAN 4MBPS 8SO", Manufacturer 1="Linear Technologies", Manufacturer Part Number 1=LTC2875IS8#PBF, Package="8-SOIC (0.154\", 3.90mm Width)", Supplier Part Number 1=LTC2875IS8#PBF-ND, ComponentLink1Description=Datasheet, ComponentLink1URL=https://www.analog.com/media/en/technical-documentation/data-sheets/2875f.pdf, Mount="Surface Mount", Supplier 1=Digi-Key
U4: library part MCU_STM32F446RET6, "ARM Cortex-M4 32-bit MCU+FPU, 512 KB Flash, 128 KB Internal RAM, 50 I/Os, 64-Pin LQFP, -40 to 85 degC, Tray", I/Os (High Current)=50, Operating Frequency(F) (Processor speed) (MHz)=180, Package Description=LQFP64, Package Reference="64-Pin Low-profile Quad Flat Package, Body 10 x 10 mm, Pitch 0.5 mm", Supplier Part Number 1=497-15376-ND, Supply Voltage(Vcc) min (V)=1.7, ComponentLink1Description="Manufacturer URL", ComponentLink1URL=http://www.st.com/, ComponentLink2Description=Datasheet, ComponentLink2URL=http://www.st.com/st-web-ui/static/active/en/resource/technical/document/datasheet/DM00141306.pdf, Core="ARM Cortex-M4", D/A Converter=2, DatasheetVersion="Rev. 6", FLASH Size (Prog) (kB)=512, Internal RAM Size (kB)=128, Mounting Technology="Surface Mount", Packing=Tray, Supplier 1=Digi-Key
U5: "IC REG BUCK ADJUSTABLE 2A SOT563", Manufacturer 1="Texas Instruments", Package="SOT-563, SOT-666", Supplier Part Number 1=296-50407-1-ND, Switching Frequency=1.5MHz, Iout=1A, Iout (Max)=2A, Manufacturer Part Number 1=TLV62568ADRLR, Supplier 1=Digi-Key, Vin (Max)=5.5V, Vin (Min)=2.5V, Vout (Max)=5.5V, Vout (Min/Fixed)=0.6V
Y1: "CRYSTAL 25.0000MHZ 12PF SMD", Case/Package=SMD/SMT, ESR (Equivalent Series Resistance)=80R, Frequency=25MHz, Frequency Stability=15ppm, Frequency Tolerance=10ppm, Load Capacitance=12pF, Manufacturer 1="Kyocera AVX", Manufacturer Part Number 1=CX2520DB25000H0FLJC1, Max Operating Temperature=85°C, Min Operating Temperature=-30°C, Ratings=AEC-Q200, Supplier Part Number 1=1253-1724-1-ND, Height=0.022inch, Length=0.098inch, Mount="Surface Mount", Supplier 1=Digi-Key, Width=0.079inch

## Nets (pads, with @x,y where several pads share a name; then routed paths per layer and width w, separated by ;. In a path a pad name is that pad's centre, name@x,y a point inside that pad or via, vN(x,y) a via of type N, cw(c..) or ccw(c..) an arc to the next point about the centre after c; other vN are vias at no path point)
3V3: C3.1 C6.1 C12.2 C13.2 C14.2 C15.2 C16.2 C17.2 C18.2 C19.2 C20.2 C22.1 D6.4 F2.2 F3.1 L1.2 P1.1 R11.2 R12.2 R13.2 R14.2 R20.2 R22.2 R24.2 R25.2 R26.2 U1.8 U2.3 U3.3 U4.1 U4.13 U4.19 U4.32 U4.48 U4.64
5V0: C21.2 C23.2 F1.2 F4.2 F5.2 F6.2 U1.1 U5.3 U5.5
CAN1_N: C1.2 CMC1.5 D1.1 D2.1 J5.2 J6.2 TP1.1
CAN1_P: C2.2 CMC1.4 D1.2 D2.2 J5.1 J6.1 TP2.1
CAN1_RX: U2.4 U4.44
CAN1_TX: U2.1 U4.45
CAN2_N: C4.2 CMC2.5 D3.1 D4.1 J5.4 J6.4 TP3.1
CAN2_P: C5.2 CMC2.4 D3.2 D4.2 J5.3 J6.3 TP4.1
CAN2_RX: U3.4 U4.33
CAN2_TX: U3.1 U4.34
DC1_ENC_CHANNEL_A: R3.2 R4.2 U4.58
DC1_ENC_CHANNEL_A_IN: J3.2 R3.1
DC1_ENC_CHANNEL_B: R5.2 R6.2 U4.59
DC1_ENC_CHANNEL_B_IN: J3.3 R5.1
DIR_DC1: J4.1 U4.21
DIR_DC2: J4.5 U4.24
GND: C1.1 C2.1 C3.2 C4.1 C5.1 C6.2 C7.1 C8.1 C9.1 C11.1 C12.1 C13.1 C14.1 C15.1 C16.1 C17.1 C18.1 C19.1 C20.1 C21.1 C22.2 C23.1 D1.3 D2.3 D3.3 D4.3 D5.2 D7.2 J1.0 J1.1 J1.2 J2.0 J2.3 J2.4 J2.7 J2.8 J3.0 J3.4 J3.5 J3.8 J3.9 J4.0 J4.3 J4.4 J4.7 J4.8 J5.0 J5.5 J6.0 J6.5 J7.0 J7.2 J7.4 J7.6 J7.8 J8.0 J8.2 P1.5 R2.1 R4.1 R6.1 R9.1 R10.1 R19.2 R27.1 S1.2 U1.4 U1.5 U2.2 U2.8 U3.2 U3.8 U4.12 U4.18 U4.31 U4.47 U4.63 U5.2 Y1.2
I2C_SCL: J1.5 R25.1 TP6.1 U4.41
I2C_SDA: J1.4 R24.1 TP5.1 U4.40
LED_1: R15.1 U4.8
LED_B_n: R16.2 U4.11
LED_G_n: R18.2 U4.10
LED_R_n: R17.1 U4.9
LIM_SW1: J7.7 R14.1 U4.56
LIM_SW2: J7.5 R13.1 U4.55
LIM_SW3: J7.3 R12.1 U4.54
LIM_SW4: J7.1 R11.1 U4.53
NetC7_2: C7.2 U4.6 Y1.1
NetC8_2: C8.2 U4.5 Y1.3
NetC9_2: C9.2 R20.1 R21.2 U4.7
NetC10_1: C10.1 S2.2
NetC10_2: C10.2 R22.1 R23.1 U4.26
NetC11_2: C11.2 U4.30
NetCMC1_1: CMC1.1 JP1.1 U2.6
NetCMC1_3: CMC1.3 R7.1 U2.7
NetCMC2_1: CMC2.1 JP2.1 U3.6
NetCMC2_3: CMC2.3 R8.1 U3.7
NetD5_1: D5.1 R15.2
NetD6_1: D6.1 R17.2
NetD6_2: D6.2 R18.1
NetD6_3: D6.3 R16.1
NetD7_1: D7.1 F6.1 J8.1
NetF1_1: F1.1 J3.6
NetF2_1: F2.1 J3.1
NetF3_2: F3.2 J1.3
NetF4_1: F4.1 J2.2
NetF5_1: F5.1 J2.6
NetJP1_2: JP1.2 R7.2
NetJP2_2: JP2.2 R8.2
NetL1_1: L1.1 U5.4
NetR19_1: R19.1 U4.60
NetR23_2: R23.2 S2.1
NetR26_1: R26.1 R27.2 U5.1
PWM_DC1: J4.2 R9.2 U4.22
PWM_DC2: J4.6 R10.2 U4.23
PWM_ENC_SCI: R1.2 R2.2
PWM_ENC_SCI_IN: J3.7 R1.1 U4.57
RESET_n: P1.8 R21.1 S1.1
SV1_PWM_5V_IN: U1.7 U4.28
SV1_PWM_OUT: J2.1 U1.2
SV2_PWM_5V_IN: U1.6 U4.29
SV2_PWM_OUT: J2.5 U1.3
SWD_CLK: P1.7 U4.49
SWD_IO: P1.6 U4.46
UART_RTS: P1.4 U4.50
UART_RX: P1.3 U4.52 UART_RX1.1
UART_TX: P1.2 U4.51 UART_TX1.1
pads on no net: H1.0 H2.0 H3.0 H4.0 U2.5 U3.5 U4.2 U4.3 U4.4 U4.14 U4.15 U4.16 U4.17 U4.20 U4.25 U4.27 U4.35 U4.36 U4.37 U4.38 U4.39 U4.42 U4.43 U4.61 U4.62 U5.6 Y1.4

## Polygon pours and split planes (outlines as drawn)
3V3 on Top Layer "NONET_L-01_P-001" (solid, pour order 0): 0,2510 6505,2510 6505,0 0,0
GND on Bottom Layer "NONET_L-01_P-001" (solid, pour order 1): 0,2510 6505,2510 6505,0 0,0

## Text inside footprints (layer, text, board x,y; h text height)
L1: Mechanical 13 "*" at 2178.03,280.32 h50
P1: Top Overlay "GND" at 1761.81,2105.04 h30 r90; Top Overlay "VCC" at 1757.87,1774.33 h30 r90; Top Overlay "RST" at 2061.81,2105.04 h30 r90; Top Overlay "CLK" at 1962.6,2101.1 h30 r90; Top Overlay "IO" at 1860.24,2105.04 h30 r90; Top Overlay "RTS" at 2068.9,1777.28 h30 r90; Top Overlay "RX" at 1962.6,1805.91 h30 r90; Top Overlay "TX" at 1860.24,1805.91 h30 r90